# Altium PCB AntDig.PcbDoc
Units mm, origin at the board's own origin, x right, y up, seen from the top; angles counter-clockwise.
Board outline 30 x 20 mm, 2 copper layers (Top Layer, Bottom Layer), stack 1.036 mm thick; 27 components, 25 nets, 104 pads, 79 vias.
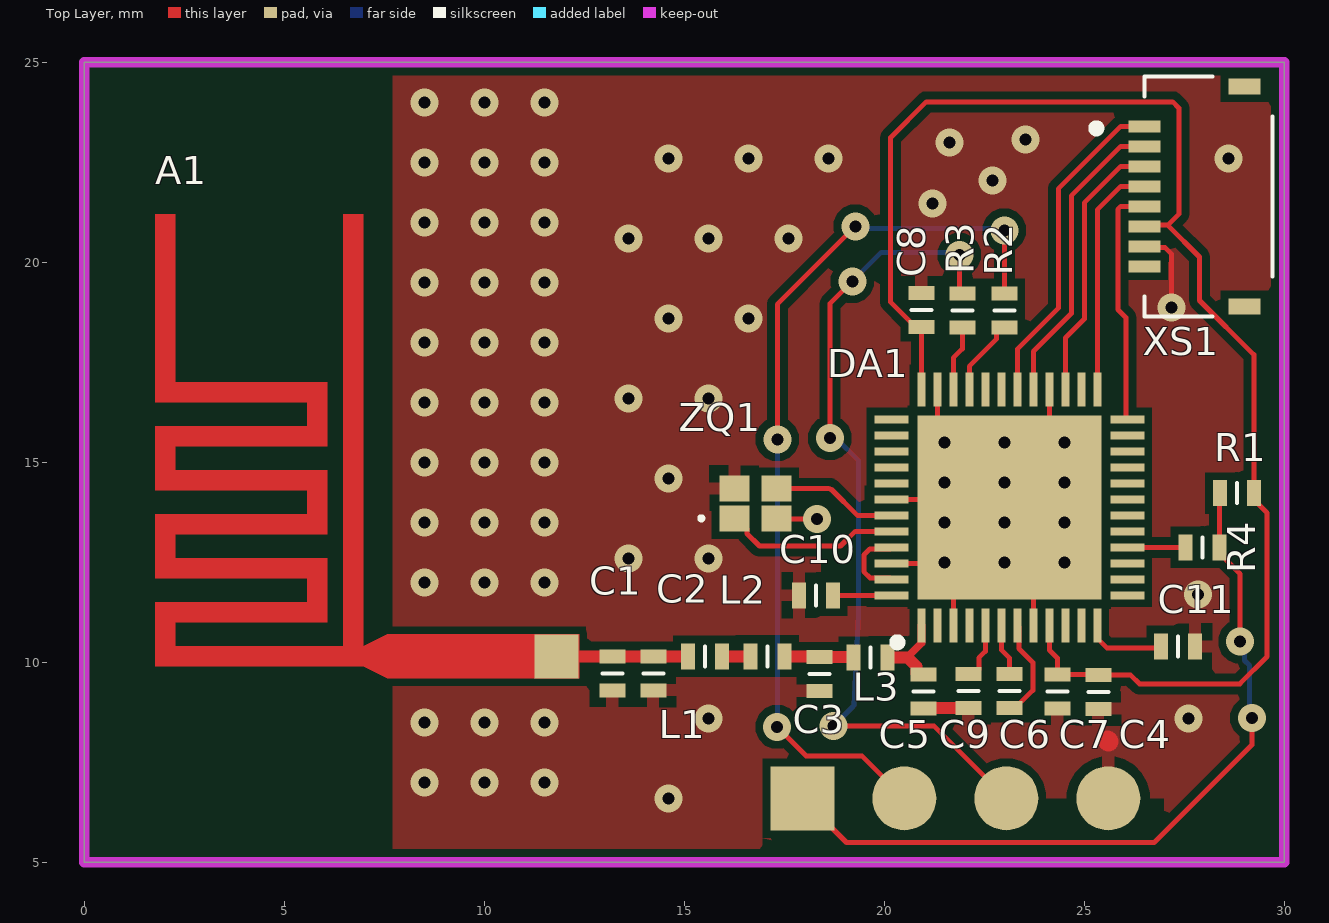
[diagram p0: Top Layer view]
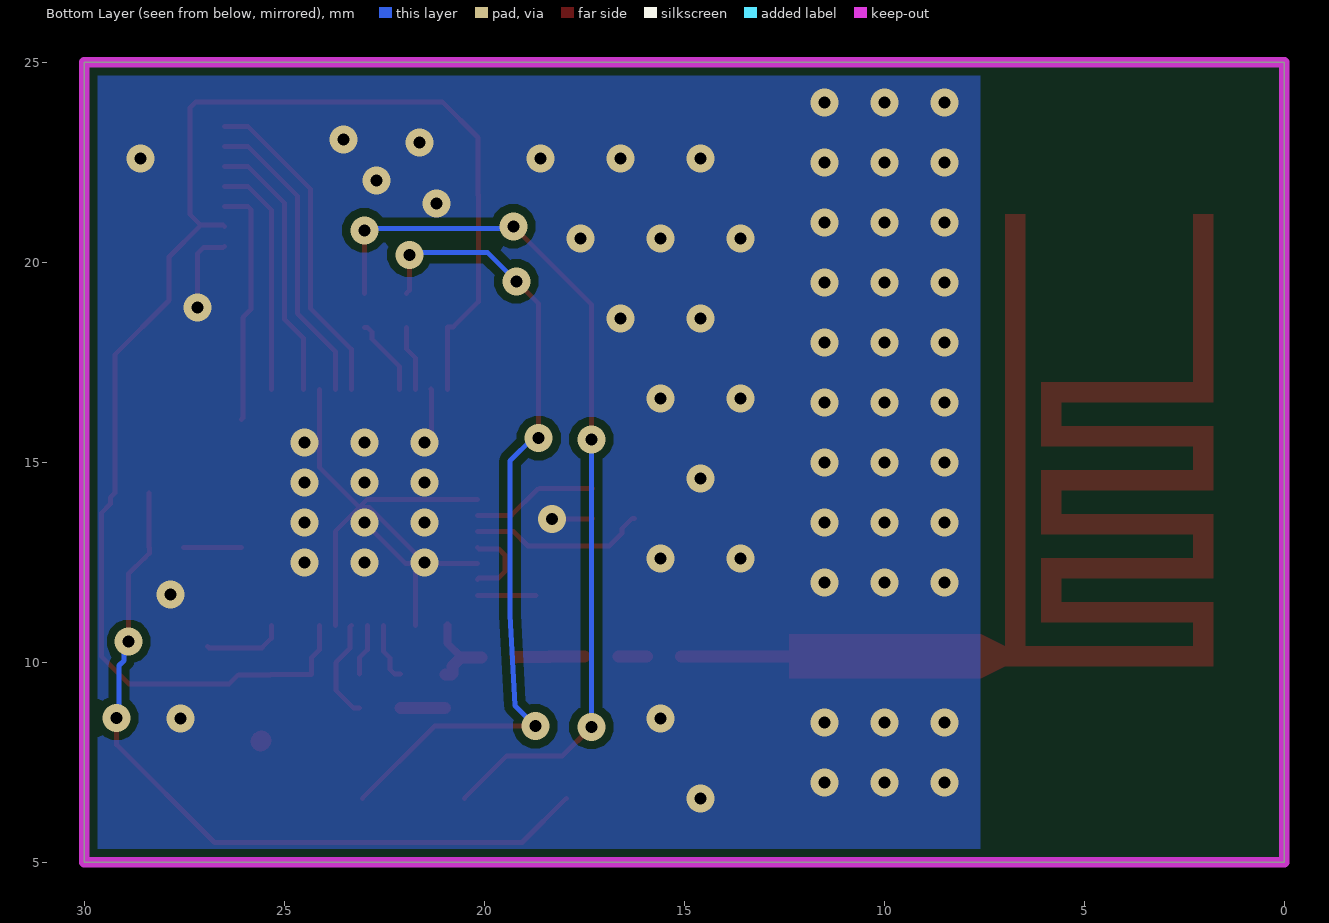
[diagram p1: Bottom Layer view, seen from below]

## Layer stack, top to bottom
Top Solder: solder mask 0.0102, Solder Resist, Dk 3.5
Top Layer: signal copper 0.018
Dielectric 1: dielectric 1, FR-4, Dk 4.8
Bottom Layer: signal copper 0.018
Bottom Solder: solder mask 0.0102, Solder Resist, Dk 3.5

## Board outline
0,5 0,25 30,25 30,5

## Design rules (kind name [scope] priority, off if disabled: settings)
AcuteAngle [All] p1: minimum=8.00000000000000E+0001 checktracksonly=FALSE
BoardOutlineClearance [All] p1: gap=0.25 ignorepadtopadclearanceinfootprint=FALSE except(0: Arc-SplitContinuation Track-SplitContinuation SMDPad-SplitContinuation THPad-SplitContinuation Via-SplitContinuation Fill-SplitContinuation Poly-SplitContinuation Region-SplitContinuation Text-SplitContinuation)
Clearance Clearance_Keep-Out [All vs (OnLayer('Keep-Out Layer, Board'))] p1: gap=0.25 ignorepadtopadclearanceinfootprint=FALSE
Clearance [All] p2: gap=0.2 ignorepadtopadclearanceinfootprint=FALSE except(0.25: Arc-Hole Track-Hole SMDPad-Hole THPad-Hole Via-Hole Fill-Hole Poly-Hole Region-Hole Text-Hole)
ComponentClearance [All] p1: gap=0.5 collisioncheckmode=3 verticalgap=0.5 showdistances=TRUE
Height [All] p1: minheight=0 maxheight=25 prefheight=12.5
HoleSize HoleSizeVIA [IsVia] p1: absolutevalues=TRUE maxlimit=5.9 minlimit=0.3 maxpercent=80.000 minpercent=20.000
HoleSize HoleSizePAD [PadIsPlated] p2: absolutevalues=TRUE maxlimit=5.9 minlimit=0.5 maxpercent=80.000 minpercent=20.000
HoleSize HoleSizePAD_1 [IsPad] p3: absolutevalues=TRUE maxlimit=5.9 minlimit=0.5 maxpercent=80.000 minpercent=20.000
HoleToHoleClearance [All] p1: gap=0.25 allowstackedmicrovias=TRUE
MinimumAnnularRing MinimumAnnularVIA [All] p1: minimumring=0.15
MinimumAnnularRing MinimumAnnularPAD [All] p2: minimumring=0.2
MinimumSolderMaskSliver [All] p1: minsoldermaskwidth=0.15
PasteMaskExpansion [All] p1: expansion=0.1
PlaneClearance [All] p1: clearance=0.25
PlaneConnect [All] p1: planeconnectstyle=Relief reliefexpansion=0.3 reliefentries=4 reliefconductorwidth=0.3 reliefairgap=0.25
PolygonConnect [All] p1: thpad.connectstyle=Relief thpad.reliefconductorwidth=0.3 thpad.reliefentries=4 thpad.polygonreliefangle="90 Angle" thpad.airgapwidth=0.25 smdpad.connectstyle=Relief smdpad.reliefconductorwidth=0.3 smdpad.reliefentries=4 smdpad.polygonreliefangle="90 Angle" smdpad.airgapwidth=0.25 via.connectstyle=Direct via.reliefconductorwidth=0.3 via.reliefentries=4 via.polygonreliefangle="90 Angle" via.airgapwidth=0.25
RoutingCorners [All] p1: cornerstyle=45-Degree minsetback=2.5 maxsetback=2.5
RoutingVias [All] p1: holewidth=0.4 width=0.8 viastyle="Through Hole" minholewidth=0.3 minwidth=0.6 maxholewidth=0.5 maxwidth=1
SilkToSilkClearance [All] p1: silktosilkclearance=0.15
SilkToSolderMaskClearance SilkscreenOverComponentPads [IsPad] p1: minsilkscreentomaskgap=0.15 clearancetoexposedcopper=TRUE
SolderMaskExpansion [All] p1: expansion=0.1 istentingtop=FALSE
UnConnectedPin [All] p1:
Width [All] p1: maxlimit=1.5 minlimit=0.125 preferedwidth=0.3
19 further rules are at their usual default settings.

## Classes and differential pairs
component class AntDig: A1 C1 C2 C3 C4 C5 C6 C7 C8 C9 C10 C11 DA1 L1 L2 L3 R1 R2 R3 R4 VD4 XS1

## Components (designator, comment, footprint, x,y, rotation, side; value= is the part's Value field where it differs from the comment)
A1 "Обозначение при заказе" antenna 12.25,9.575 r90 top locked
C1 "10п" cap0402 13.201,9.311 r90 top
C2 "1п" cap0402 15.925,10.15 r180 top
C3 "1,5п" cap0402 18.375,9.3 r90 top
C4 "4,7мк" cap0402 25.35,8.85 r90 top
C5 "1,5п" cap0402 20.976,8.861 r90 top
C6 "1мк" cap0402 23.125,8.875 r90 top
C7 "100п" cap0402 24.326,8.861 r90 top
C8 "1мк" cap0402 20.925,19.225 r270 top
C9 "1мк" cap0402 22.1,8.875 r90 top
C10 "2,2мк" cap0402 17.875,11.675 r0 top
C11 "4,7мк" cap0402 27.759,10.402 r180 top
DA1 "RSL10" RSL10 20.125,10.875 r90 top
L1 "0,4н" IND0402 14.225,9.3 r90 top
L2 "1,8н" IND0402 16.65,10.15 r0 top
L3 "3н" IND0402 19.225,10.125 r0 top
R1 "10к" RES0402 29.238,14.233 r180 top
R2 "68" RES0402 23,18.375 r90 top
R3 "68" RES0402 21.95,18.375 r90 top
R4 "68" RES0402 27.525,12.875 r0 top
XS1 "FFC-82328702-8" FFC8 29.026,18.9 r90 top
ZBOAS135491984 "Comment" "BOASVIEWdrill:Таблица отверстий:0:0:0:0" 9,2311 r0 top
ZBOAS194494582 "Слой 1" "BOASVIEWlayer:Top Layer:5:1:1:1" 24,2377 r0 top (schematic designator fewf)
ZBOAS867798519 "Comment" "BOASVIEWside:Вид платы слева:5:0:0:0" 195,2477 r0 top
ZBOAS966194582 "Слой 2" "BOASVIEWlayer:Bottom Layer:5:-2:32:1" 220,2377 r180 top (schematic designator fewf)
ZQ1 "Обозначение при заказе" XTAL48 16.25,13.6 r0 top
? "PLS-6БСАР.430420.014ТУ" PSL_4 17.95,6.6 r0 top

## Footprints (in the part's own frame and the unit in brackets; to place one, negate y for a bottom-side part, rotate by r counter-clockwise, add the part's x,y. Pads: shape width x height; smd on the part's side, far side on the other; paste and mask are expansions set on the pad)
antenna [mm]
  rect 1.1x1.1 smd paste-2539.97 mask+0.102: 1(0.575,0.45)
  Top Layer region: 0.025,4.675 0.325,5.275 0.325,10.475 1.925,10.475 1.925,6.675 2.525,6.675 2.525,10.475 4.125,10.475 4.125,6.675 4.725,6.675 4.725,10.475 6.325,10.475 6.325,6.675 6.925,6.675 6.925,10.475 11.625,10.475 11.625,9.975 7.425,9.975 7.425,6.175 5.825,6.175 5.825,9.975 5.225,9.975 5.225,6.175 3.625,6.175 3.625,9.975 3.025,9.975 3.025,6.175 1.425,6.175 1.425,9.975 0.825,9.975 0.825,5.775 11.625,5.775 11.625,5.275 0.825,5.275 1.125,4.675 1.125,-0.125 0.025,-0.125
"BOASVIEWdrill:Таблица отверстий:0:0:0:0" [mm]
"BOASVIEWlayer:Bottom Layer:5:-2:32:1" [mm]
"BOASVIEWlayer:Top Layer:5:1:1:1" [mm]
"BOASVIEWside:Вид платы слева:5:0:0:0" [mm]
cap0402 [mm]
  rect 0.35x0.65 smd: 1(-0.011,0.001) 2(0.839,0.001)
  silkscreen extent 0.41,-0.25 0.41,0.25, body extent -0.07,-0.25 0.92,0.25, height 0.55
FFC8 [mm]
  rect 0.4x0.8 smd: 0(0,0.026) 0(5.5,0.026)
  rect 0.3x0.8 smd: 1(4.5,2.526) 2(4,2.526) 3(3.5,2.526) 4(3,2.526) 5(2.5,2.526) 6(2,2.526) 7(1.5,2.526) 8(1,2.526)
  silkscreen extent -0.25,-0.67 5.75,3.83, body extent -0.25,-0.68 5.75,3.15, height 1.11
IND0402 [mm]
  rect 0.35x0.65 smd: 1(0,0) 2(0.85,0)
  silkscreen extent 0.43,-0.25 0.43,0.25, body extent -0.07,-0.25 0.92,0.25, height 0.55
PSL_4 [mm]
  rect 1.6x1.6 smd: 1(0,0)
  round 1.6 smd: 2(2.55,0) 3(5.1,0) 4(7.65,0)
RES0402 [mm]
  rect 0.35x0.65 smd: 1(0,0) 2(0.85,0)
  silkscreen extent 0.43,-0.25 0.43,0.25, body extent -0.08,-0.25 0.92,0.25, height 0.35
RSL10 [mm]
  rect 0.85x0.2 smd: 1(0.05,-0.8) 2(0.05,-1.2) 3(0.05,-1.6) 4(0.05,-2) 5(0.05,-2.4) 6(0.05,-2.8) 7(0.05,-3.2) 8(0.05,-3.6) 9(0.05,-4) 10(0.05,-4.4) 11(0.05,-4.8) 12(0.05,-5.2) 25(5.95,-5.2) 26(5.95,-4.8) 27(5.95,-4.4) 28(5.95,-4) 29(5.95,-3.6) 30(5.95,-3.2) 31(5.95,-2.8) 32(5.95,-2.4) 33(5.95,-2) 34(5.95,-1.6) 35(5.95,-1.2) 36(5.95,-0.8)
  rect 0.2x0.85 smd: 13(0.8,-5.95) 14(1.2,-5.95) 15(1.6,-5.95) 16(2,-5.95) 17(2.4,-5.95) 18(2.8,-5.95) 19(3.2,-5.95) 20(3.6,-5.95) 21(4,-5.95) 22(4.4,-5.95) 23(4.8,-5.95) 24(5.2,-5.95) 37(5.2,-0.05) 38(4.8,-0.05) 39(4.4,-0.05) 40(4,-0.05) 41(3.6,-0.05) 42(3.2,-0.05) 43(2.8,-0.05) 44(2.4,-0.05) 45(2,-0.05) 46(1.6,-0.05) 47(1.2,-0.05) 48(0.8,-0.05)
  rect 4.6x4.6 smd: 49(3,-3)
  silkscreen extent -0.47,-0.3 -0.28,-0.1, body extent -0.05,-6.02 6.05,0.07, height 1
XTAL48 [mm]
  rect 0.75x0.65 smd: 1(0,0) 2(1.05,0) 3(1.05,0.75) 4(0,0.75)
  silkscreen extent -0.87,-0.05 -0.77,0.05, body extent -0.31,-0.26 1.36,1.01, height 0.45

## Part data
A1: library part antenna, "Описание свойств компонента"
C1 C2 C3 C4 C5 C6 C7 C8 C9 C10 C11: library part CapCer, "Керамический конденсатор", manufacture=ОЖО.460.107ТУ, Name="Керамический конденсатор", Units=Ф
  C1: name_main=GRM1535C1H100J
  C2: name_main=GRM1555C1H1R0BA01D
  C3 C5: name_main=CL10C1R5CB8NNNC
  C4 C11: name_main=GRM21BR60J335K
  C6 C8 C9: name_main=CC0603KRX7R7BB105, nameSuf=-3
  C7: name_main=GRM1885C1H101J
  C10: name_main=GRM188R61A225K
L1 L2 L3: library part Ind, "Катушка индуктивности", Name="Катушка индуктивности", Units=Гн
  L1: name_main=MLG1005S0N4BTD25
  L2: name_main=LQG15HN1N8S02D
  L3: name_main=LQG15HS3N0S02D
R1: library part Res, "Резистор", Manufacturer=АЛЯР.434110.005ТУ, Tolerance=5%, Name=Резистор, name_main=RC0603FR-0710KL
R2 R3 R4: library part Res, "Резистор", Manufacturer=АЛЯР.434110.005ТУ, Name=Резистор, name_main=AC0603FR-0768RL
XS1: library part FFC8, manufacture=2328702-8, Name=Разъемы, name_main=FFC-8
ZQ1: library part XTAL48, "ECS-480-8-47-JTN-TR"
?: library part PSL4, manufacture=БСАР.430420.014ТУ, Name=Разъемы, name_main=PLS-6
DA1: Parameter 1=NCH-RSL10

## Via types
v1: diameter 0.7, hole 0.3, Top Layer to Bottom Layer, tented both sides, 46 vias
v2: diameter 0.7, hole 0.3, Top Layer to Bottom Layer, 33 vias

## Nets (pads, with @x,y where several pads share a name; then routed paths per layer and width w, separated by ;. In a path a pad name is that pad's centre, name@x,y a point inside that pad or via, vN(x,y) a via of type N, cw(c..) or ccw(c..) an arc to the next point about the centre after c; other vN are vias at no path point)
1V8: C4.2 C7.2 C8.2 DA1.9 DA1.36 R1.1 XS1.6 | length 36.8
  Top Layer w0.125: 20.15,21.7 20.15,21.662 ; DA1.36 20.925,18.385 C8.2 20.776,18.386 20.15,19.012 20.15,21.662 ; DA1.9 24.125,10.306 24.325,10.106 C7.2 24.331,9.694 25.343,9.694 C4.2 26.15,9.689 26.377,9.461 28.886,9.461 29.567,10.142 29.567,13.739 29.35,13.956 29.35,14.12 R1.1 29.238,17.691 27.881,19.048 27.881,20.135 27.088,20.929 ; XS1.6 26.529,20.929 27.088,20.929 ; 20.15,21.662 20.155,21.667 20.155,22.966 20.159,22.97 20.159,23.12 21.052,24.012 27.209,24.012 27.363,23.859 27.363,21.204 27.088,20.929
A\L\E\R\T\: DA1.25 XS1.4 | length 5.9
  Top Layer w0.125: DA1.25 25.325,21.313 25.912,21.9 XS1.4
BUSY: DA1.27 XS1.3 | length 6.7
  Top Layer w0.125: DA1.27 24.525,18.11 25,18.585 25,21.488 25.912,22.4 XS1.3
GND: ?.4 C1.1 C3.1 C4.1 C5.1 C7.1 C8.1 C9.1 C10.1 C11.1 DA1.3 DA1.8 DA1.28 DA1.35 DA1.42 DA1.46 DA1.49 L1.1 XS1.7 ZQ1.2 ZQ1.4 | length 22.5
  Top Layer w0.125: ZQ1.2 17.322,13.578 v1(18.313,13.578) ; DA1.46 21.475,12.475 v1(21.5,12.5) 22.875,13.875 DA1.49 ; DA1.42 22.925,14.075 DA1.49 ; C5.1 C5.1@20.982,8.857 ; DA1.35@21.337,16.837 DA1.35 21.325,15.675 v1(21.5,15.5) ; DA1.3 21.725,12.475 21.975,12.475 v1(23,13.5) 23,13.75 DA1.49 ; C9.1@22.092,8.857 C9.1 ; DA1.8 23.725,13.275 DA1.49 ; DA1.28 24.125,14.875 DA1.49 ; XS1.7 26.527,20.373 27.014,20.373 27.175,20.212 v1(27.175,18.875)
  Top Layer w0.3: C5.1@20.982,8.857 C9.1@22.092,8.857
  Top Layer w0.5: 25.575,8.05 25.6,8.025
  other v1: 14.6,6.6 15.6,8.6 27.6,8.6 27.841,11.69 23,12.5 24.5,12.5 13.6,12.6 15.6,12.6 21.5,13.5 24.5,13.5 21.5,14.5 23,14.5 24.5,14.5 14.6,14.6 23,15.5 24.5,15.5 13.6,16.6 15.6,16.6 14.6,18.6 16.6,18.6 13.6,20.6 15.6,20.6 17.6,20.6 21.2,21.475 22.7,22.05 14.6,22.6 16.6,22.6 18.6,22.6 28.6,22.6 21.625,23 23.525,23.075
  other v2: 8.5,7 10,7 11.5,7 8.5,8.5 10,8.5 11.5,8.5 8.5,12 10,12 11.5,12 8.5,13.5 10,13.5 11.5,13.5 8.5,15 10,15 11.5,15 8.5,16.5 10,16.5 11.5,16.5 8.5,18 10,18 11.5,18 8.5,19.5 10,19.5 11.5,19.5 8.5,21 10,21 11.5,21 8.5,22.5 10,22.5 11.5,22.5 8.5,24 10,24 11.5,24
LED: DA1.24 XS1.5 | length 6
  Top Layer w0.125: DA1.24 26.038,16.112 26.037,18.619 25.837,18.819 25.837,21.325 25.912,21.4 XS1.5
NetA1_1: A1.1 C1.2 C2.2 L1.2 | length 3.3
  Top Layer w0.3: A1.1 C1.2 L1.2 C2.2
NetC2_1: C2.1 L2.1 | length 0.7
  Top Layer w0.3: C2.1 L2.1
NetC3_2: C3.2 L2.2 L3.1 | length 1.7
  Top Layer w0.3: L2.2 17.506,10.144 18.368,10.144 C3.2 18.381,10.132 19.218,10.132 L3.1
NetC5_2: C5.2 DA1.1 L3.2 | length 2.1
  Top Layer w0.2: 20.573,10.125 20.925,10.477 DA1.1
  Top Layer w0.3: L3.2 20.573,10.125 20.8,9.898 20.8,9.725 20.825,9.7 C5.2
NetC6_1: C6.1 DA1.7 | length 2.6
  Top Layer w0.125: C6.1 23.274,8.864 23.711,9.301 23.711,9.998 23.362,10.347 23.362,10.888 DA1.7
NetC6_2: C6.2 DA1.6 | length 1.3
  Top Layer w0.125: DA1.6 22.925,10.312 23.124,10.114 C6.2
NetC9_2: C9.2 DA1.5 | length 1.5
  Top Layer w0.125: C9.2 22.249,9.714 22.361,9.826 22.361,10.113 22.525,10.276 DA1.5
NetC10_2: C10.2 DA1.48 | length 1.5
  Top Layer w0.125: C10.2 18.715,11.675 DA1.48
NetC11_2: C11.2 DA1.12 | length 2
  Top Layer w0.125: DA1.12 25.325,10.6 25.563,10.362 26.881,10.362 C11.2
NetDA1_16: DA1.16 R4.1 | length 1.5
  Top Layer w0.125: DA1.16 R4.1
NetDA1_33: DA1.33 R2.1 | length 2
  Top Layer w0.125: DA1.33 22.125,17.4 22.811,18.086 22.811,18.263 22.923,18.375 R2.1
NetDA1_34: DA1.34 R3.1 | length 1.6
  Top Layer w0.125: DA1.34 21.725,17.613 21.95,17.838 R3.1
NetDA1_43: DA1.43 ZQ1.3 | length 3.1
  Top Layer w0.125: ZQ1.3 18.604,14.35 ccw(c18.857,14.908) 18.678,14.322 19.325,13.675 DA1.43
NetDA1_44: DA1.44 ZQ1.1 | length 4.4
  Top Layer w0.125: ZQ1.1 16.3,13.6 16.562,13.338 16.562,13.223 16.879,12.906 18.906,12.906 19.275,13.275 DA1.44
NetDA1_45: DA1.45 DA1.47 | length 2
  Top Layer w0.125: DA1.47 20.138,12.112 19.641,12.112 19.487,12.266 19.487,12.684 19.641,12.838 20.138,12.838 DA1.45
NetR1_2: ?.1 R1.2 R4.2 | length 19.4
  Top Layer w0.125: ?.1 19.057,5.493 26.746,5.493 29.19,7.938 v1(29.19,8.608) ; R1.2 28.381,14.226 28.381,12.881 R4.2 28.375,12.725 28.487,12.613 28.492,12.613 28.894,12.211 v1(28.894,10.519)
  Bottom Layer w0.125: v1(28.894,10.519) 29.004,10.409 29.004,10.048 29.133,9.919 29.133,8.665 v1(29.19,8.608)
NetR2_2: ?.2 R2.2 | length 22.6
  Top Layer w0.125: v1(17.322,8.384) 18.044,7.663 19.437,7.663 ?.2 ; v1(17.325,15.575) 17.325,18.95 v1(19.275,20.9) ; v1@22.95,20.8 v1(23,20.8) R2.2
  Bottom Layer w0.125: v1(17.322,8.384) v1(17.322,8.384) 17.324,15.574 v1(17.325,15.575) ; v1(19.275,20.9) 19.325,20.85 22.95,20.85 v1(23,20.8)
NetR3_2: ?.3 R3.2 | length 21.2
  Top Layer w0.125: v1(18.639,15.604) 18.639,18.964 v1(19.2,19.525) ; v1(18.726,8.403) 21.247,8.403 ?.3 ; v1@21.765,20.36 21.875,20.25 21.875,19.3 R3.2
  Bottom Layer w0.125: v1(18.639,15.604) 18.792,15.604 19.358,15.038 19.358,11.209 19.359,11.201 19.359,11.19 19.239,8.917 19.205,8.883 18.755,8.433 v1(18.726,8.403) ; v1(19.2,19.525) 19.925,20.25 21.812,20.25 v1(21.875,20.187)
SCL: DA1.30 XS1.1 | length 8.2
  Top Layer w0.125: DA1.30 23.325,17.829 24.35,18.854 24.35,21.838 25.912,23.4 XS1.1
SDA: DA1.29 XS1.2 | length 7.6
  Top Layer w0.125: DA1.29 23.725,17.769 24.675,18.719 24.675,21.663 25.912,22.9 XS1.2
pads on no net: DA1.2 DA1.4 DA1.10 DA1.11 DA1.13 DA1.14 DA1.15 DA1.17 DA1.18 DA1.19 DA1.20 DA1.21 DA1.22 DA1.23 DA1.26 DA1.31 DA1.32 DA1.37 DA1.38 DA1.39 DA1.40 DA1.41 XS1.0 XS1.8

## Polygon pours and split planes (outlines as drawn)
GND on Bottom Layer "GND_L02_P000" (solid, remove dead copper, pour order 0): 7.595,24.993 7.595,5 30,5 30,25
GND on Top Layer "GND_L01_P002" (solid, remove dead copper, pour order 2): 7.716,24.955 7.716,4.962 30.121,4.962 30.121,24.962

## Keep-outs
Keep-Out Layer:
  the board outline again, w0.254

## Other copper
Top Layer:
  pour cut-out: 18.878,20.124 19.351,20.597 19.882,20.597 19.882,19.767 19.75,19.634
  pour cut-out: 16.95,5.6 16.95,5.303 16.976,5.277 17.299,5.6 18.571,5.6 18.571,5.434 18.751,5.255
  pour cut-out: 27,5.5 27,6.6 23.596,6.6 23.538,6.542 23.538,5.58
  pour cut-out: 20.175,12.475 19.643,13.007 18.411,13.007 18.411,12.186 18.596,12 19.5,12
  pour cut-out: 0,5 7.6,5 7.6,25 0,25
Bottom Layer:
  pour cut-out: 0,5 7.6,5 7.6,25 0,25

## Silkscreen, mask and mechanical layers (free items; w line width, h text height)
Mechanical 7:
  text "BOASFORMAT|А3|1|0|883070867|165354330|1000000000|5:1|" at -25.4,2514.6 h0
  text "DimV|0|-39370078|19448819|985196850|-7086614|-36220472|5||||js12|False|True|False|False" at 24,2477 h0
  text "DimH|-59055118|0|78503937|985196850|-21259843|3543307|5||||js12|False|True|False|False" at 174,2477 h0
  text "DimH|-1968504|0|88346457|985196850|0|3543307|5||||js12|False|True|False|False" at 200.25,2477 h0
  text "DimRoughness|0|0|-93858268|-954881890|1|||||0|0|False|2" at 195,2407 h0 r90
  text "DimRoughness|0|0|-91496063|-956456693|1|||||0|0|False|2" at 200.67,2407 h0 r270
  text "SET2|Superlayer=MechanicalLayer7|Wsuperlayer=MechanicalLayer8|Layergrid=MechanicalLayer9|Werase=MechanicalLayer11|Layermark=MechanicalLayer12|Layerstamp=MechanicalLayer13|Thinline=0,18|Basicline=0,6|Gridline=0,18|Boardline=0,6|Contourpolygonline=0,6|PcbGridStep=1|PcbGridNumbering=False|PcbGridCleareanceAtView=0|PcbGridNumberEach=l5|PcbGridLineEach=l1|PcbGridCountSecondaryStrip=10|PcbGridEnabledStrip=True|PcbGridHorizontal90=False|PcbGridWhiteAreaBeforeText=True|PcbSignalGridEnabled=True|PcbSignalShowBukva=True|RealSignalLayerNames=False|PcbGridEnabledBothSide=False|PcbPolarGridEnabled=False|PcbPolarGridAngleStep=1|PcbPolarGridRadialStep=1|PcbPolarGridCenterPcbGrid=False|SilkShowPad=True|SilkViewName=Слой маркировки|SilkShowHole=True|SilkShowAxis=True|SilkShowBukva=True|SilkShowGrid=False|SolderShowGrid=False|SolderViewName=Слой маски|SolderShowAxis=False|SolderShowBukva=False|MainViewShowGrid=False|MainViewMinDiameterHoles=2|MainViewUseShapesDrill=True|ShowBukvaOnSboky=True|ShowBukvaViews=True|Density=2,2|CustomHoleSizeFactor=1|TableName=Таблица 1|RazrezWidth=100|RealLayerNames=False|RazrezShowBukva=False|RazrezBukva=В-В|Sher=Rz 80|Asstoplayer=MechanicalLayer1|Asstoplayer2=None|Assbottomlayer=None|Assbottomlayer2=None|AssMinDiameterHoles=2|AssDim=False|AssMech=False|AssSilk=False|AssComponentSilk=False|AssFreeSilk=False|AssSmdPads=False|AssGridEnable=False|AssShowBukva=True|Mirror=Horisontal|PcbGridFontSize=5|PcbGridCenterZero=False|TTStampDistance=12|MainFontSize=5|PolyShtrihEnable=True|RegionShtrihEnable=False|PolyStep=2|PcbDrillDrawingGridEnabled=True|PcbDrillDrawingViewName=Слой сверловки|PcbDrillDrawingShowBukva=False|PcbDrillDrawingShowAxis=True|PcbSignalLayersUseDrill=False|PcbSignalLayersUseWhiteHoles=True|PcbSignalLayersUseShapesDrill=False|PcbSignalLayersShowAxis=True" at -25.4,-25.375 h0
  text "TT0008#" at -25.4,-25.4 h0
  text "TT0007#8. Остальные требования по ОСТ 4ГО.070.014." at -25.4,-25.4 h0
  text "TT0006#7. Переходные отверстия паяльной маской не закрывать." at -25.4,-25.4 h0
  text "TT0005#6. Финишное покрытие: 0-Ко.Гор.ПОС-61." at -25.4,-25.4 h0
  text "TT0004#5. Конфигурацию проводников выдержать по чертежу с отклонением 0,05 мм с учетом обеспечения необходимых зазоров в узких местах." at -25.4,-25.4 h0
  text "TT0003#4. Шаг координатной сетки 0,625 мм." at -25.4,-25.4 h0
  text "TT0002#3. Материал-заменитель: СФ-1-18Г-2 1кл. ГОСТ 10316-76" at -25.4,-25.4 h0
  text "TT0001#2. Плату изготовить кобминированным позитивным методом." at -25.4,-25.4 h0
  text "TT0000#1. *Размеры для справок" at -25.4,-25.4 h0
  text "STAMP|Разработал|Митр Д.В." at -25.4,-25.4 h0
  text "STAMP|Проверил|Глазков В.В." at -25.4,-25.4 h0
  text "STAMP|Техконтроль|" at -25.4,-25.4 h0
  text "STAMP|Начальник отдела|" at -25.4,-25.4 h0
  text "STAMP|Нормоконтроль|" at -25.4,-25.4 h0
  text "STAMP|Утвердил|" at -25.4,-25.4 h0
  text "STAMP|Var|" at -25.4,-25.4 h0
  text "STAMP|Tech|Т.контр." at -25.4,-25.4 h0
  text "STAMP|Normo|Н.контр." at -25.4,-25.4 h0
  text "STAMP|Check|Пров." at -25.4,-25.4 h0
  text "STAMP|Design|Разраб." at -25.4,-25.4 h0
  text "STAMP|Utv|Утв." at -25.4,-25.4 h0
  text "STAMP|Обозначение|" at -25.4,-25.4 h0
  text "STAMP|Первичная применяемость|" at -25.4,-25.4 h0
  text "STAMP|Компания1|Группа СМ5-111 Кафедра СМ5" at -25.4,-25.4 h0
  text "STAMP|Наименование1|Плата печатная" at -25.4,-25.4 h0
  text "STAMP|ТипДокумента|" at -25.4,-25.4 h0
  text "STAMP|Материал1|Материал стеклотекстолит СФ-1Н-18Г-2 2кл. ГОСТ 10316-78" at -25.4,-25.4 h0
  text "STAMP|Материал2|" at -25.4,-25.4 h0
  text "STAMP|Масса|" at -25.4,-25.4 h0
  text "STAMP|Lit|" at -25.4,-25.4 h0
  text "STAMP|Наименование2|" at -25.4,-25.4 h0
  text "STAMP|Компания2| МГТУ им Н.Э.Баумана" at -25.4,-25.4 h0
  text "BOASVIADRILLTABLE:none,118110,79,H12" at -25.4,-25.4 h0
  text "2BOASDRILLTABLE:" at -25.4,-25.4 h0
Mechanical 8:
  region: 200.342,2485.908 202.035,2485.261 205.749,2484.77 205.75,2485.904 204.818,2485.905 205.25,2485.342 200.343,2485.997
  region: 200.342,2486.092 202.035,2486.739 205.749,2487.23 205.75,2486.096 204.818,2486.095 205.25,2486.658 200.343,2486.003
  region: 195.158,2486.092 193.465,2486.739 189.751,2487.23 189.75,2486.096 190.682,2486.095 190.25,2486.658 195.157,2486.003
  region: 195.158,2485.908 193.465,2485.261 189.751,2484.77 189.75,2485.904 190.682,2485.905 190.25,2485.342 195.157,2485.997
  region: 6.092,2377.092 6.739,2378.785 7.23,2382.499 6.096,2382.5 6.095,2381.568 6.658,2382 6.003,2377.093
  region: 5.908,2377.092 5.261,2378.785 4.77,2382.499 5.904,2382.5 5.905,2381.568 5.342,2382 5.997,2377.093
  region: 5.908,2476.908 5.261,2475.215 4.77,2471.501 5.904,2471.5 5.905,2472.432 5.342,2472 5.997,2476.907
  region: 6.092,2476.908 6.739,2475.215 7.23,2471.501 6.096,2471.5 6.095,2472.432 6.658,2472 6.003,2476.907
  region: 173.908,2486.092 172.215,2486.739 168.501,2487.23 168.5,2486.096 169.432,2486.095 169,2486.658 173.907,2486.003
  region: 173.908,2485.908 172.215,2485.261 168.501,2484.77 168.5,2485.904 169.432,2485.905 169,2485.342 173.907,2485.997
  region: 24.092,2485.908 25.785,2485.261 29.499,2484.77 29.5,2485.904 28.568,2485.905 29,2485.342 24.093,2485.997
  region: 24.092,2486.092 25.785,2486.739 29.499,2487.23 29.5,2486.096 28.568,2486.095 29,2486.658 24.093,2486.003
Mechanical 9:
  circle w0.18: c204,2407 r1.67
  circle w0.18: c191.67,2407 r1.67
  region: 200.25,2486 205.25,2486.658 204.75,2486 205.25,2485.342
  region: 195.25,2486 190.25,2485.342 190.75,2486 190.25,2486.658
  region: 6,2377 5.342,2382 6,2381.5 6.658,2382
  region: 6,2477 6.658,2472 6,2472.5 5.342,2472
  region: 174,2486 169,2485.342 169.5,2486 169,2486.658
  region: 24,2486 29,2486.658 28.5,2486 29,2485.342
  lines w0.18: 5,2377 24,2377 ; 5,2477 24,2477 24,2487 ; 6,2377 6,2477 ; 24,2486 174,2486 ; 174,2477 174,2487 ; 186.5,2411.91 195,2407 190,2404.11 ; 187.25,2486 223.58,2486 ; 195.25,2477 195.25,2487 ; 200.25,2477 200.25,2487 ; 205.67,2409.89 200.67,2407 209.17,2402.09
  text "30-0,1" at 89.196,2488.53 h7.68
  text "1*" at 206.13,2488.53 h7.68
  text "20-0,1" at 3.47,2417.04 h7.68 r90
Mechanical 13:
  lines w0.18: 204.6,2227.6 269.6,2227.6 ; 204.6,2232.6 269.6,2232.6 ; 204.6,2237.6 269.6,2237.6 ; 204.6,2242.6 269.6,2242.6 ; 204.6,2247.6 269.6,2247.6 ; 204.6,2262.6 269.6,2262.6 ; 204.6,2267.6 269.6,2267.6 ; 204.6,2272.6 269.6,2272.6 ; 344.56,2242.6 344.56,2257.6 ; 349.58,2242.6 349.58,2257.6 ; 366.3,2496.7 369.4,2491.3 375,2501.1 ; -25.4,2217.6 394.6,2217.6 394.6,2514.6 -25.4,2514.6 -25.4,2217.6
  lines w0.6: -17.4,2247.6 -5.4,2247.6 ; -17.4,2282.6 -5.4,2282.6 ; -17.4,2307.6 -5.4,2307.6 ; -17.4,2332.6 -5.4,2332.6 ; -17.4,2449.6 -5.4,2449.6 ; -12.4,2222.6 -12.4,2367.6 ; -12.4,2389.6 -12.4,2509.6 ; -5.4,2367.6 -17.4,2367.6 -17.4,2222.6 -5.4,2222.6 ; -5.4,2389.6 -17.4,2389.6 -17.4,2509.6 -5.4,2509.6 ; -5.4,2495.6 64.6,2495.6 64.6,2509.6 ; 204.6,2222.6 204.6,2277.6 389.6,2277.6 ; 204.6,2252.6 269.6,2252.6 ; 204.6,2257.6 269.6,2257.6 ; 211.6,2252.6 211.6,2277.6 ; 221.6,2222.6 221.6,2277.6 ; 244.6,2222.6 244.6,2277.6 ; 259.6,2222.6 259.6,2277.6 ; 269.6,2222.6 269.6,2277.6 389.6,2277.6 ; 269.6,2237.6 339.6,2237.6 389.6,2237.6 ; 269.6,2262.6 389.6,2262.6 ; 326.6,2498.6 331.6,2489.6 339.2,2503.6 ; 339.3,2503.6 381.6,2503.6 ; 339.6,2222.6 339.6,2262.6 ; 339.6,2242.6 389.6,2242.6 ; 339.6,2257.6 354.6,2257.6 389.6,2257.6 ; 354.6,2242.6 354.6,2262.6 ; 360.17,2237.6 360.17,2242.6 ; 371.6,2242.6 371.6,2262.6 ; 389.6,2285.6 389.6,2277.6 ; -5.4,2222.6 389.6,2222.6 389.6,2509.6 -5.4,2509.6 ; -5.4,2222.6 -5.4,2509.6
  text "Rz 80" at 339.3,2491.3 h10.75
  text "(" at 362.6,2491.3 h10.75
  text ")" at 373.6,2491.3 h10.75
  text "Перв. примен." at -13.362,2469.579 h5.38 r90
  text "Справ. №" at -13.362,2412.104 h5.38 r90
  text "Подп. и дата" at -13.362,2340.171 h5.38 r90
  text "Инв. № дубл." at -13.362,2310.686 h5.38 r90
  text "Взам. инв. №" at -13.362,2285.708 h5.38 r90
  text "1. *Размеры для справок / 2. Плату изготовить кобминированным позитивным методом. / 3. Материал-заменитель: СФ-1-18Г-2 1кл. ГОСТ 10316-76 / 4. Шаг координатной сетки 0,625 мм. / 5. Конфигурацию проводников выдержать по чертежу с отклонением 0,05 мм с учетом обеспечения необходимых зазоров в узких местах. / 6. Финишное покрытие: 0-Ко.Гор.ПОС-61. / 7. Переходные отверстия паяльной маской не закрывать. / 8. Остальные требования по ОСТ 4ГО.070.014." at 209.6,2285.6 h7.68
  text "Лит." at 343.794,2258.562 h5.38
  text "Масса" at 358.516,2258.562 h5.38
  text "Масштаб" at 373.436,2258.562 h5.38
  text "Подп. и дата" at -13.362,2255.671 h5.38 r90
  text "Изм." at 205.169,2253.562 h5.38
  text "Лист" at 212.458,2253.562 h5.38
  text "№ докум." at 226.6,2253.562 h5.38
  text "Подп." at 248.373,2253.562 h5.38
  text "Дата" at 260.393,2253.562 h5.38
  text "Разраб." at 205.133,2248.371 h5.38
  text "Митр Д.В." at 222.28,2248.371 h5.38
  text "Плата печатная" at 286,2248 h7.68
  text "5:1" at 377.543,2247.903 h7.68
  text "Пров." at 205.133,2243.371 h5.38
  text "Глазков В.В." at 222.28,2243.371 h5.38
  text "Т.контр." at 205.133,2238.371 h5.38
  text "Лист" at 341.042,2238.371 h5.38
  text "Листов" at 362.085,2238.371 h5.38
  text "1" at 382,2238.371 h5.38
  text "Группа СМ5-111 Кафедра СМ5" at 340.1,2231.437 h5.81
  text "Материал стеклотекстолит СФ-1Н-18Г-2 2кл. ГОСТ 10316-78" at 270.088,2229.027 h3.75
  text "Н.контр." at 205.133,2228.371 h5.38
  text "Инв. № подл." at -13.362,2225.686 h5.38 r90
  text "МГТУ им Н.Э.Баумана" at 340.453,2224.903 h7.68
  text "Утв." at 205.133,2223.371 h5.38
  text "Копировал" at 280.133,2218.371 h5.38
  text "Формат А3" at 360.877,2218.371 h5.38

## Text inside footprints (layer, text, board x,y; h text height)
ZBOAS135491984: Mechanical 12 "Таблица 1" at 9,2312.5 h7.68; Mechanical 12 "Обозначение" at 14.144,2305.053 h7.68; Mechanical 12 "отв." at 23.663,2297.553 h7.68; Mechanical 12 "Диаметр отв.," at 50.533,2305.053 h7.68; Mechanical 12 "мм" at 62.986,2297.553 h7.68; Mechanical 12 "Диаметр конт." at 86.5,2305.053 h7.68; Mechanical 12 "площадки, мм" at 87.776,2297.553 h7.68; Mechanical 12 "Наличие" at 128.965,2305.053 h7.68; Mechanical 12 "металлизации" at 122.047,2297.553 h7.68; Mechanical 12 "Кол." at 161.395,2305.053 h7.68; Mechanical 12 "отв." at 161.175,2297.553 h7.68; Mechanical 12 "79" at 162.881,2288.303 h7.68; Mechanical 12 "0,3" at 62.776,2288.303 h7.68; Mechanical 12 "+0,1" at 71.25,2292.212 h5.38; Mechanical 12 "Да" at 134.983,2288.303 h7.68; Mechanical 12 "0,7" at 99.18,2288.303 h7.68
ZBOAS194494582: Mechanical 7 "0" at 16.851,2374.803 h7.68; Mechanical 7 "5" at 16.708,2399.803 h7.68; Mechanical 7 "10" at 15.685,2424.803 h7.68; Mechanical 7 "15" at 15.77,2449.803 h7.68; Mechanical 7 "20" at 13.801,2474.803 h7.68; Mechanical 7 "0" at 22.425,2365.603 h7.68; Mechanical 7 "5" at 47.354,2365.603 h7.68; Mechanical 7 "10" at 71.842,2365.603 h7.68; Mechanical 7 "15" at 96.885,2365.603 h7.68; Mechanical 7 "20" at 120.9,2365.603 h7.68; Mechanical 7 "25" at 145.943,2365.603 h7.68; Mechanical 7 "30" at 171.057,2365.603 h7.68
ZBOAS966194582: Mechanical 7 "0" at 374,2374.803 h7.68; Mechanical 7 "5" at 374,2399.803 h7.68; Mechanical 7 "10" at 374,2424.803 h7.68; Mechanical 7 "15" at 374,2449.803 h7.68; Mechanical 7 "20" at 374,2474.803 h7.68; Mechanical 7 "0" at 368.425,2365.603 h7.68; Mechanical 7 "5" at 343.354,2365.603 h7.68; Mechanical 7 "10" at 317.842,2365.603 h7.68; Mechanical 7 "15" at 292.885,2365.603 h7.68; Mechanical 7 "20" at 266.9,2365.603 h7.68; Mechanical 7 "25" at 241.943,2365.603 h7.68; Mechanical 7 "30" at 217.057,2365.603 h7.68